# Altium PCB PCB_DO_AN_1_ver2.PcbDoc
Units mm, origin at the board's own origin, x right, y up, seen from the top; angles counter-clockwise.
Board outline 74.17 x 48.77 mm, 2 copper layers (Top Layer, Bottom Layer); 62 components, 44 nets, 228 pads, 44 vias.
Unrouted connection lines stored in the file: 1.
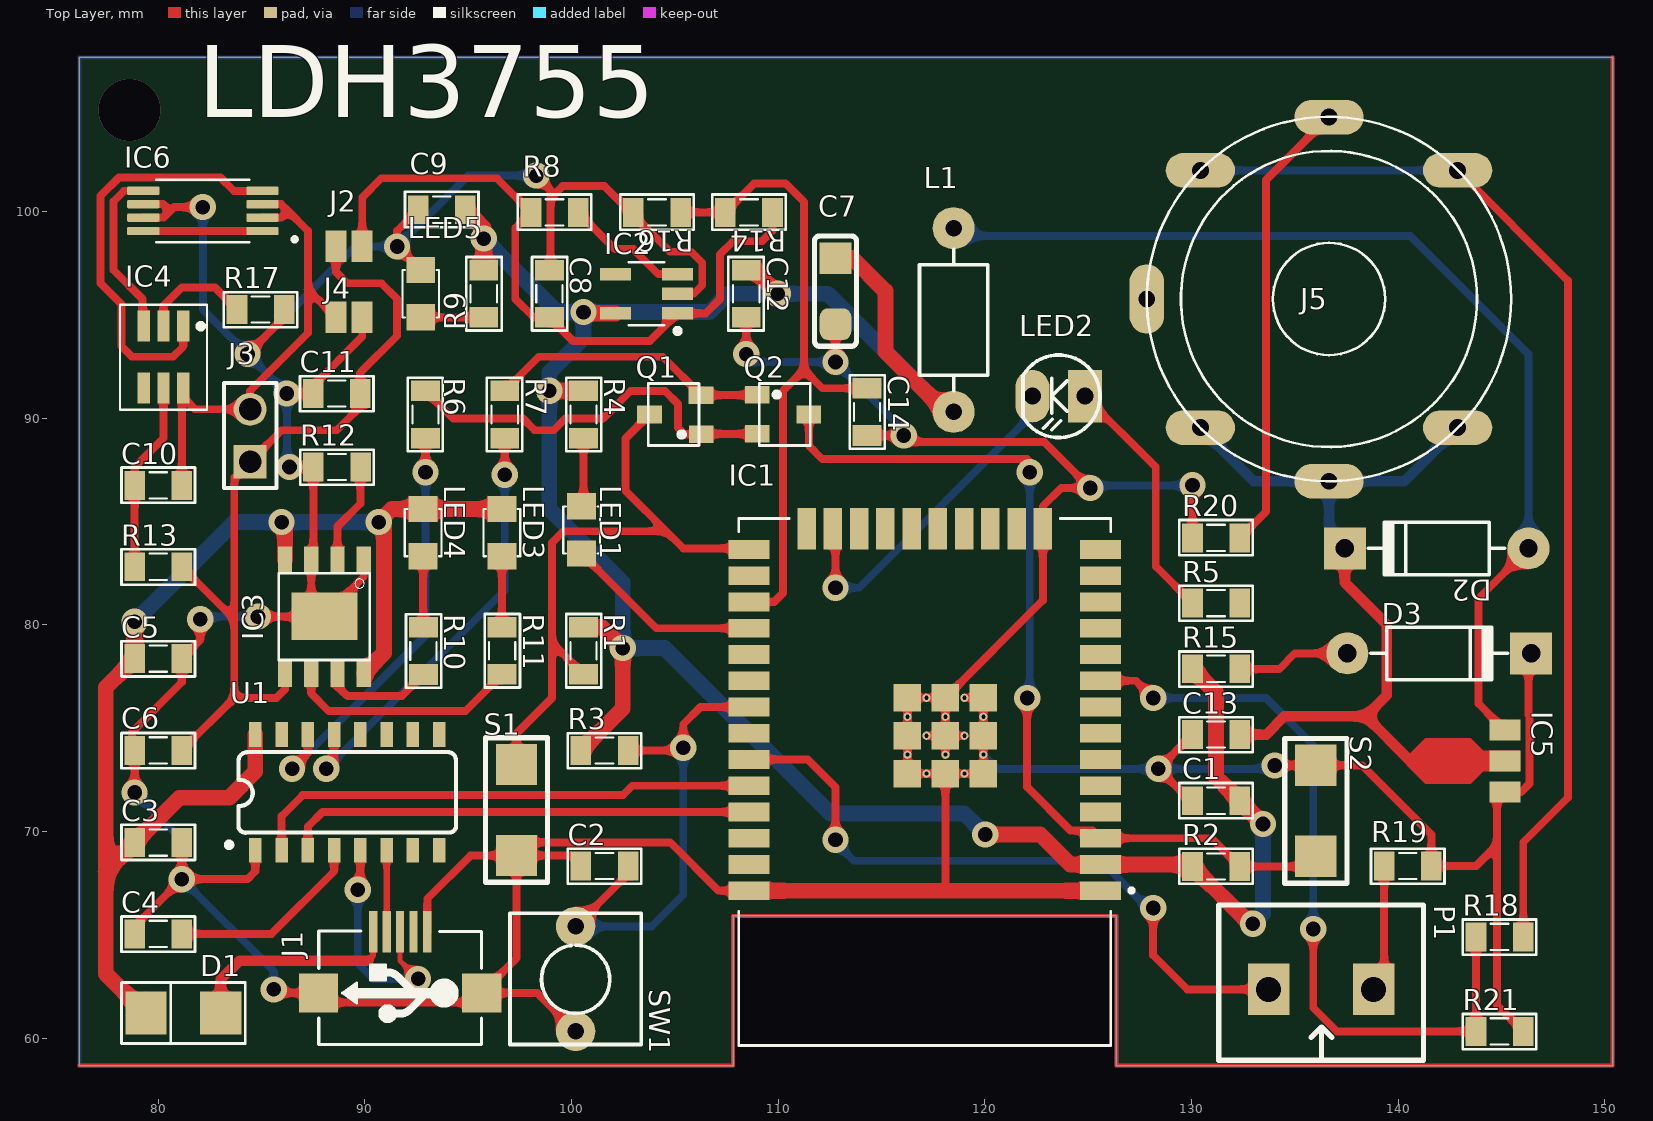
[diagram p0: Top Layer view]
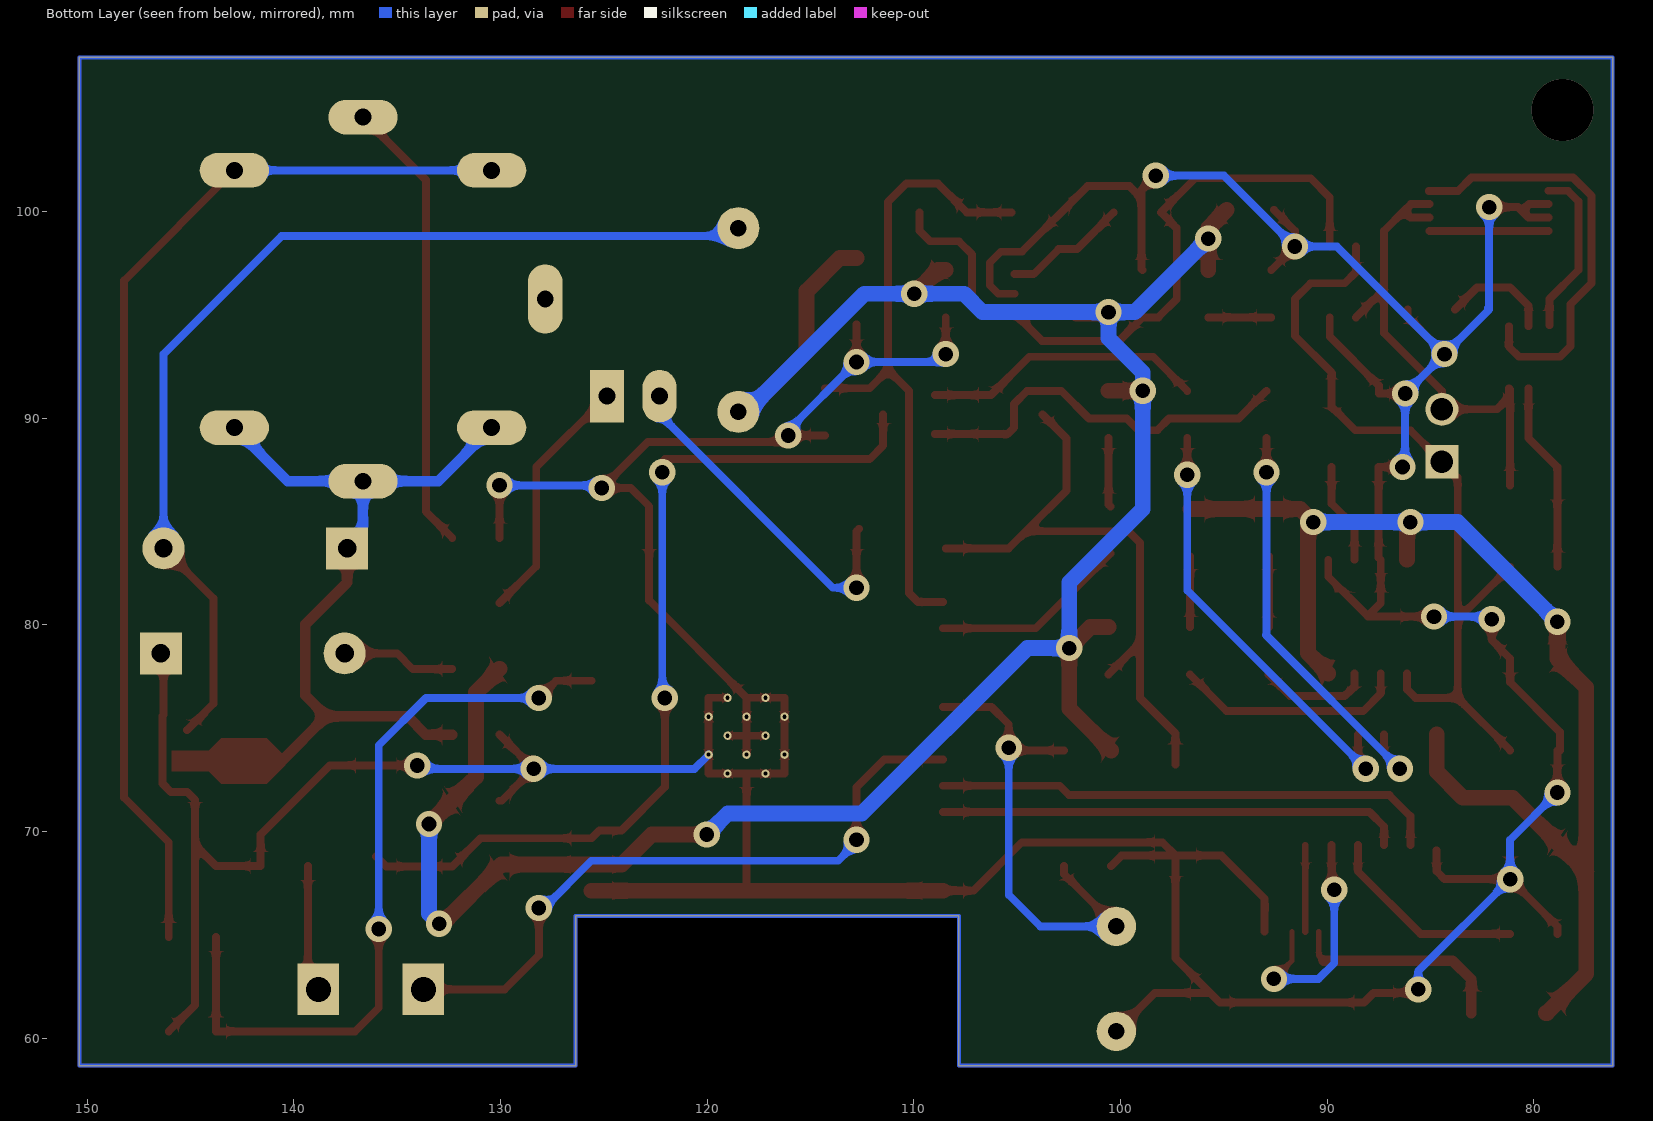
[diagram p1: Bottom Layer view, seen from below]
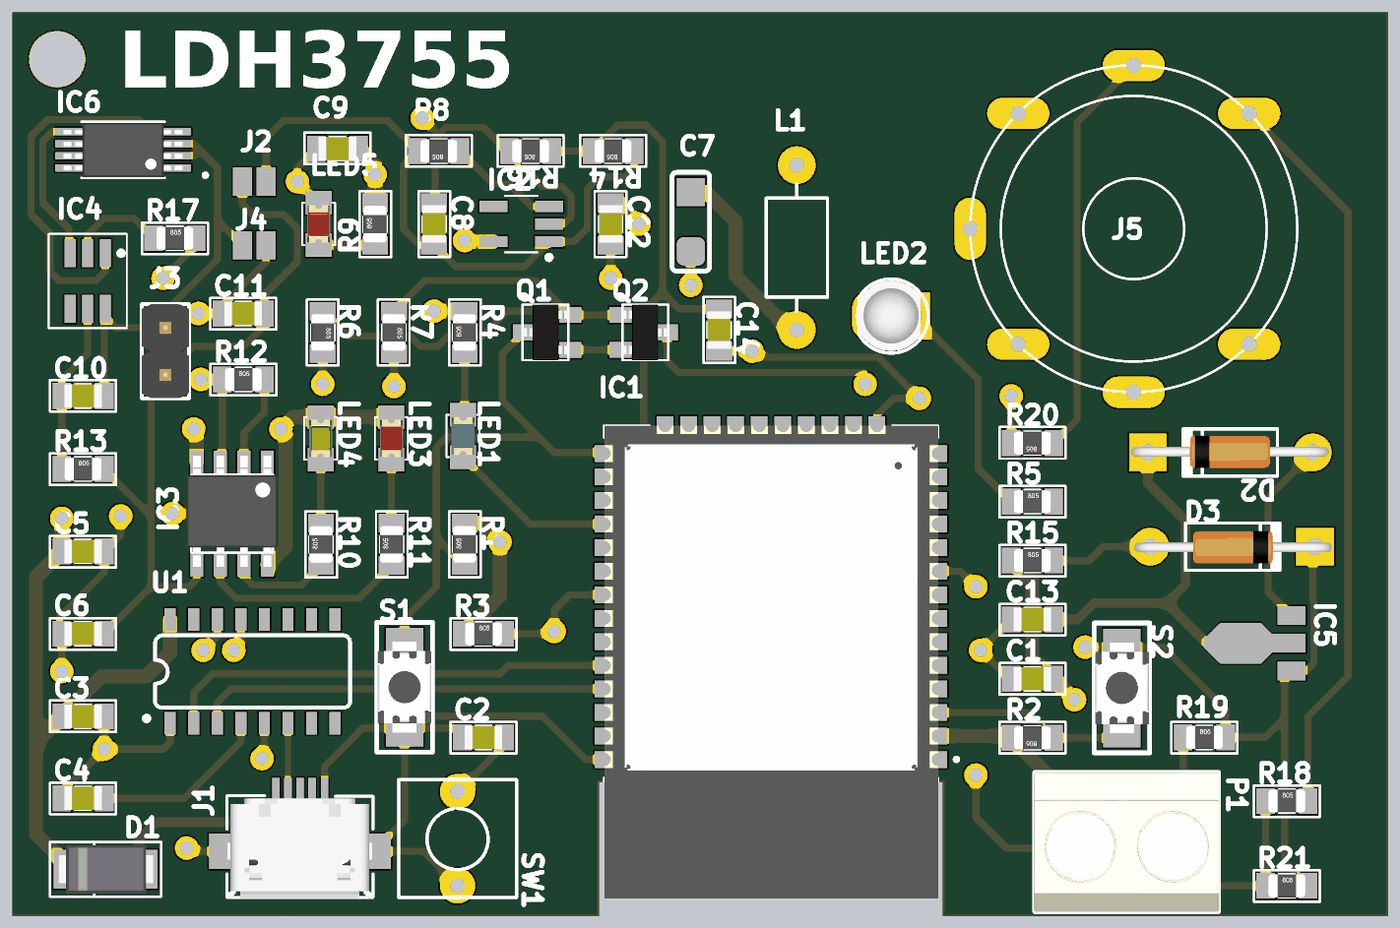
[diagram p2: 3D render of the assembled board from above, using the file's embedded part models]

## Layer stack, top to bottom
Top Solder: solder mask 0.0102, Solder Resist, Dk 3.5
Top Layer: signal copper 0.0356
Dielectric 1: dielectric 0.32, FR-4, Dk 4.8
Bottom Layer: signal copper 0.0356
Bottom Solder: solder mask 0.0102, Solder Resist, Dk 3.5

## Board outline
76.2,58.674 76.2,107.442 150.368,107.442 150.368,58.674 126.365,58.674 126.365,65.913 107.823,65.913 107.823,58.674

## Design rules (kind name [scope] priority, off if disabled: settings)
Clearance [All] p1: gap=0.254 ignorepadtopadclearanceinfootprint=TRUE except(0: Arc-Hole Track-Hole SMDPad-Hole THPad-Hole Via-Hole Fill-Hole Poly-Hole Region-Hole Text-Hole)
PolygonConnect [All] p1: connectstyle=Relief reliefconductorwidth=0.254 reliefentries=4 polygonreliefangle="90 Angle" airgapwidth=0.254
RoutingVias [All] p1: holewidth=0.508 width=0.762 viastyle="Through Hole" minholewidth=0.508 minwidth=0.762 maxholewidth=0.711 maxwidth=1.27
SolderMaskExpansion [All] p1: expansion=0.102
Width [All] p1: maxlimit=0.762 minlimit=0.254 preferedwidth=0.381
30 further rules are at their usual default settings.

## Classes and differential pairs
component class U_Sensor: J5 P1 R18 R19 R20 R21
component class U_POWER: C5 C6 C7 C8 C9 C10 C11 C12 C13 C14 D2 D3 IC2 IC3 IC4 IC5 IC6 J2 J3 J4 L1 LED3 LED4 LED5 R8 R9 R10 R11 R12 R13 R14 R15 R16 R17
component class U_MCU: C1 C2 C3 C4 D1 IC1 J1 LED1 LED2 Q1 Q2 R1 R2 R3 R4 R5 R6 R7 S1 S2 SW1 U1

## Components (designator, comment, footprint, x,y, rotation, side; value= is the part's Value field where it differs from the comment)
C1 "104" CAP_0805 131.191,71.481 r180 top value=33p
C2 "10uF" CAP_0805 101.6,68.326 r0 top value=33p
C3 "10uF" CAP_0805 80.01,69.456 r180 top value=33p
C4 "100nF" CAP_0805 80.01,65.043 r0 top value=33p
C5 "100nF" CAP_0805 80.01,78.359 r0 top value=33p
C6 "100nF" CAP_0805 80.01,73.92 r0 top value=33p
C7 "220uF" CAP_TANTALUM_3216 112.776,96.139 r270 top
C8 "470nF" CAP_0805 98.933,96.012 r90 top value=33p
C9 "100nF" CAP_0805 93.726,100.076 r180 top value=33p
C10 "100nF" CAP_0805 80.01,86.741 r180 top value=33p
C11 "100nF" CAP_0805 88.646,91.186 r0 top value=33p
C12 "104" CAP_0805 108.458,96.012 r270 top value=33p
C13 "104" CAP_0805 131.191,74.686 r0 top value=33p
C14 "100nF" CAP_0805 114.3,90.297 r90 top value=33p
D1 "Diode SMD" DIO-214AC(SMA) 81.153,61.265 r0 top value=1N5007
D2 "1N4007" D1A 146.304,83.693 r0 top
D3 "1N4007" D1A 137.541,78.613 r180 top
IC1 "ESP32-WROOM-32" MODULE_ESP32-WROOM-32 117.094,72.39 r180 top
IC2 "RT9013" SOT23-5 103.632,96.012 r180 top
IC3 "TP4056" TP4056 88.048,80.391 r270 top
IC4 "DW01A" SOT23-6 80.264,92.94 r270 top
IC5 "Power IC" SOT-89-3 143.161,73.406 r90 top
IC6 "FS8205A" FS8205A 82.169,100.076 r180 top
J1 "USB-5" USB-M1 91.709,65.151 r180 top
J2 "Jumper2" JUMPER2 89.878,98.298 r0 top
J3 "VBAT_IN" JP2-D1T 84.455,87.884 r90 top
J4 "Jumper2" JUMPER2 89.878,94.869 r0 top
J5 "Gas Sensor Socket" MQ2 136.652,95.758 r180 top
L1 "150mH" L/0.4 118.491,90.297 r90 top value="150 mH"
LED1 "LED" LED-0805-Blue 100.495,85.725 r270 top value="LED 3 ly Single Colour"
LED2 "LED" LED-3 124.841,91.059 r180 top value="LED 3 ly Single Colour"
LED3 "LED" LED-0805-Red 96.634,85.598 r270 top value="LED 3 ly Single Colour"
LED4 "LED" LED-0805-Green 92.824,85.598 r270 top value="LED 3 ly Single Colour"
LED5 "" LED-0805-Red 92.71,94.869 r90 top value="LED 3 ly Single Colour"
P1 "Header 2 - M" "Medium - Header 2" 136.271,62.357 r180 top
Q1 "2SC1815" SOT23D 105.029,90.17 r90 top value=C1815
Q2 "2SC1815" SOT23D 110.236,90.17 r270 top value=C1815
R1 "10k" RES-SMD-0805 100.584,78.74 r90 top
R2 "10k" RES-SMD-0805 131.191,68.301 r180 top
R3 "10k" RES-SMD-0805 101.6,73.914 r0 top
R4 "Resistor - SMD" RES-SMD-0805 100.584,90.17 r90 top
R5 "Resistor - SMD" RES-SMD-0805 131.191,81.046 r0 top
R6 "10k" RES-SMD-0805 92.939,90.17 r270 top
R7 "10k" RES-SMD-0805 96.774,90.17 r270 top
R8 "10k" RES-SMD-0805 99.187,99.949 r180 top
R9 "1k" RES-SMD-0805 95.758,96.012 r90 top
R10 "1k" RES-SMD-0805 92.837,78.731 r90 top
R11 "1k" RES-SMD-0805 96.647,78.74 r90 top
R12 "1k2" RES-SMD-0805 88.657,87.63 r0 top
R13 "0.1k" RES-SMD-0805 80.01,82.804 r0 top
R14 "30k" RES-SMD-0805 108.585,99.949 r180 top
R15 "Resistor - SMD" RES-SMD-0805 131.191,77.866 r0 top
R16 "100k" RES-SMD-0805 104.14,99.949 r180 top
R17 "1k" RES-SMD-0805 84.963,95.25 r0 top
R18 "Resistor - SMD" RES-SMD-0805 144.907,64.897 r0 top
R19 "Resistor - SMD" RES-SMD-0805 140.462,68.326 r0 top
R20 "Resistor - SMD" RES-SMD-0805 131.191,84.201 r180 top
R21 "Resistor - SMD" RES-SMD-0805 144.907,60.325 r0 top
S1 "SW-SMD" "SW 3x2x4" 97.344,71.034 r270 top
S2 "SW-SMD" "SW 3x2x4" 136.017,70.993 r90 top
SW1 "SW" SW2 100.203,60.325 r90 top value="SW chip 2 pin"
U1 "CH340C" SOP-16 89.154,71.888 r0 top

## Footprints (in the part's own frame and the unit in brackets; to place one, negate y for a bottom-side part, rotate by r counter-clockwise, add the part's x,y. Pads: shape width x height; smd on the part's side, far side on the other; paste and mask are expansions set on the pad)
CAP_0805 [mil]
  rect 39.37x55 smd: 1(-45,0) 2(45,0)
  silkscreen extent -70,-34 70,33, body extent -40,-25 40,25, height 24
CAP_TANTALUM_3216 [mil]
  rect 60x60 smd: 1(-62.99,0)
  rrect50% 60x60 smd: 2(62.99,0)
  silkscreen extent -105,-40 105,40, body extent -67,-35 67,35, height 67
D1A [mil] "Diode 1A, W 100mil, L 350mil"
  round 80 hole 35: 1(0,0)
  rect 80x80 hole 35: 2(-350,0)
  silkscreen extent -305,-50 -45,50, body extent -386,-33 34,36, height 84
DIO-214AC(SMA) [mm] "DO-214AC Diode Smallest Size"
  rect 2x2.1 smd: 1(1.88,-0.051) 2(-1.732,-0.051)
  silkscreen extent -2.92,-1.52 3.07,1.42, body extent -2.5,-1.35 2.7,1.25, height 2.4
FS8205A [mm]
  rrect25% 1.56x0.4 smd: 1(-2.88,1.031) 2(-2.88,0.381) 3(-2.88,-0.269) 4(-2.88,-0.919) 5(2.88,-0.919) 6(2.88,-0.269) 7(2.88,0.381) 8(2.88,1.031)
  silkscreen extent -4.54,-1.46 2.25,1.57, body extent -3.2,-1.4 3.2,1.53, height 1.2
JP2-D1T [mm] "2 pins, 1 row, straight, gold plating"
  rect 1.6x1.6 hole 1.1: 1(0,0)
  round 1.6 hole 1.1: 2(2.54,0)
  silkscreen extent -1.27,-1.27 3.81,1.27, body extent -1.27,-1.27 3.81,1.27, height 8.54
JUMPER2 [mil]
  rect 40x60 smd: 1(-50,0) 2(0,0)
L/0.4 [mil] "Inductor , 2 Pin, L 350mil, W 150 mil"
  round 80 hole 31: 1(0,0) 2(350,0)
  silkscreen extent 40,-65 310,65
LED-3 [mil] "LED 2 PIN, 3ly Only colour"
  rect 65x100 hole 32: 1(0,0)
  oval 65x100 hole 32: 2(100,0)
  silkscreen extent -29,-78 118,79, body extent -13,-75 125,75, height 217
LED-0805-Blue [mil]
  rect 50x55 smd: 1(0,0) 2(90,0)
  silkscreen extent 0,-35 90,35, body extent 5,-25 85,25, height 43
LED-0805-Green [mil]
  rect 50x55 smd: 1(0,0) 2(90,0)
  silkscreen extent 0,-35 90,35, body extent 5,-25 85,25, height 43
LED-0805-Red [mil]
  rect 50x55 smd: 1(0,0) 2(90,0)
  silkscreen extent 0,-35 90,35, body extent 5,-25 85,25, height 43
"Medium - Header 2" [mm]
  rect 2x2.5 hole 1.2: 1(-2.54,0) 2(2.54,0)
  silkscreen extent -4.95,-4.08 4.95,3.43, body extent -5,-4.07 5,3.43, height 10
MODULE_ESP32-WROOM-32 [mm]
  rect 2x0.9 smd: 1(-8.5,5.26) 2(-8.5,3.99) 3(-8.5,2.72) 4(-8.5,1.45) 5(-8.5,0.18) 6(-8.5,-1.09) 7(-8.5,-2.36) 8(-8.5,-3.63) 9(-8.5,-4.9) 10(-8.5,-6.17) 11(-8.5,-7.44) 12(-8.5,-8.71) 13(-8.5,-9.98) 14(-8.5,-11.25) 25(8.5,-11.25) 26(8.5,-9.98) 27(8.5,-8.71) 28(8.5,-7.44) 29(8.5,-6.17) 30(8.5,-4.9) 31(8.5,-3.63) 32(8.5,-2.36) 33(8.5,-1.09) 34(8.5,0.18) 35(8.5,1.45) 36(8.5,2.72) 37(8.5,3.99) 38(8.5,5.26)
  rect 0.9x2 smd: 15(-5.715,-12.25) 16(-4.445,-12.25) 17(-3.175,-12.25) 18(-1.905,-12.25) 19(-0.635,-12.25) 20(0.635,-12.25) 21(1.905,-12.25) 22(3.175,-12.25) 23(4.445,-12.25) 24(5.715,-12.25)
  rect 1.33x1.33 smd: 39_1(-2.835,-0.405) 39_2(-1,-0.405) 39_3(0.835,-0.405) 39_4(-2.835,-2.24) 39_5(-1,-2.24) 39_6(0.835,-2.24) 39_7(-2.835,-4.075) 39_8(-1,-4.075) 39_9(0.835,-4.075)
  round 0.4 hole 0.2: 39_10(-1.917,-0.405) 39_11(-0.082,-0.405) 39_12(-2.835,-1.322) 39_13(-1,-1.322) 39_14(0.835,-1.322) 39_15(-1.917,-2.24) 39_16(-0.082,-2.24) 39_17(-2.835,-3.157) 39_18(-1,-3.157) 39_19(0.835,-3.157) 39_20(-1.917,-4.075) 39_21(-0.082,-4.075)
  silkscreen extent -10.1,-12.75 9,12.75, body extent -9.02,-12.75 8.98,12.75, height 3.2
MQ2 [mil] "6P-D17.6X9.8H"
  oval 132x66 hole 32: 1(-244.98,245) 2(0,347) 3(245,245) 4(245,-244.98) 5(0,-346.46) 6(-244.98,-244.98)
  oval 66x132 hole 32: 7(347,0)
  silkscreen extent -347,-347 347,347
RES-SMD-0805 [mil]
  rect 39.37x55 smd: 1(-45,0) 2(45,0)
  silkscreen extent -70,-34 70,33, body extent -39,-25 39,25, height 31
SOP-16 [mm]
  rect 0.6x1.2 smd: 1(-4.445,-2.8) 2(-3.175,-2.8) 3(-1.905,-2.8) 4(-0.635,-2.8) 5(0.635,-2.8) 6(1.905,-2.8) 7(3.175,-2.8) 8(4.445,-2.8) 9(4.445,2.8) 10(3.175,2.8) 11(1.905,2.8) 12(0.635,2.8) 13(-0.635,2.8) 14(-1.905,2.8) 15(-3.175,2.8) 16(-4.445,2.8)
  silkscreen extent -5.84,-2.67 5.26,1.95, body extent -4.95,-3.47 4.95,3.47, height 1.75
SOT23-5 [mm] "SOT23, 5-Leads, Body 3.0x3.0mm (max), Pitch 0.95mm, IPC Medium Density"
  rect 1.5x0.6 smd: 1(-1.5,0.95) 2(-1.5,0) 3(-1.5,-0.95) 4(1.5,-0.95) 5(1.5,0.95)
  silkscreen extent -1.63,-1.52 0.87,1.92, body extent -1.75,-1.52 1.75,1.53, height 1.45
SOT23-6 [mm] "SOT23, 5-Leads, Body 3.0x3.0mm (max), Pitch 0.95mm, IPC Medium Density"
  rect 1.5x0.6 smd: 1(-1.5,0.95) 2(-1.5,0) 3(-1.5,-0.95) 4(1.5,-0.95) 5(1.5,0) 6(1.5,0.95)
  silkscreen extent -2.54,-2.11 2.54,2.11, body extent -1.75,-1.52 1.75,1.53, height 1.45
SOT23D [mm] "SOT 23C - 1-3-2 - BCE"
  rect 0.85x1.2 smd: 1(-0.95,-1.25) 2(0.94,-1.245) 3(0,1.25)
  silkscreen extent -1.5,-1.14 1.5,1.32, body extent -1.5,-1.17 1.5,1.33, height 1.06
SOT-89-3 [mm]
  rect 1x1.5 smd: 1(-1.5,-2) 3(1.5,-2)
  rect 1x1.5 smd paste-2 mask+0: 2(0,-2)
  Top Layer region: 1.1,1.85 1.1,-0.35 0.5,-0.95 0.5,-2.75 -0.5,-2.75 -0.5,-0.95 -1.1,-0.35 -1.1,1.85 -0.2,2.75 0.2,2.75
SW2 [mil] "SW button 2pin, 250x 250 mil"
  round 75 hole 31: 1(0,0) 2(200,0)
  silkscreen extent -25,-125 225,125
"SW 3x2x4" [mm]
  rect 2x2 smd: 1(-2.2,0) 2(2.2,0)
  silkscreen extent -3.5,-1.5 3.5,1.5, body extent -2.45,-1.45 2.45,1.45, height 2
TP4056 [mm]
  rect 1.3x0.7 smd: 1(-2.75,1.905) 2(-2.75,0.635) 3(-2.75,-0.635) 4(-2.75,-1.905) 5(2.75,-1.905) 6(2.75,-0.635) 7(2.75,0.635) 8(2.75,1.905)
  rect 2.3x3.2 smd: 3(-0.025,0)
  silkscreen extent -2.1,-2.2 2.1,2.2, body extent -3.13,-2.45 2.87,2.45, height 1.75
USB-M1 [mm]
  rect 0.4x2 smd: 1(1.3,0) 2(0.65,0) 3(0,0) 4(-0.65,0) 5(-1.321,0)
  rect 1.9x1.9 smd: 5(-3.95,2.968) 5(3.95,2.968)
  silkscreen extent -3.94,-0.03 3.94,5.46, body extent -3.98,0.11 4,5.54, height 2.71

## Part data
C1 C2 C3 C4 C5 C6 C8 C9 C10 C11 C12 C13 C14: library part CapSMD, "Capacitor", LatestRevisionDate=17-Jul-2002, LatestRevisionNote="Re-released for DXP Platform.", PackageReference=RAD-0.3, Published=8-Jun-2000, Publisher="Altium Limited"
C7: library part "Cap Pol", "Polarized Capacitor (Axial)", LatestRevisionDate=17-Jul-2002, LatestRevisionNote="Re-released for DXP Platform.", PackageReference=POLAR0.8, Published=8-Jun-2000, Publisher="Altium Limited"
D1: "Default Diode", Code - JEDEC=DO-214-AB, Published=8-Jun-2000, Publisher="Altium Limited", Revision="July-2002: Re-released for DXP Platform."
D2 D3: library part D1A, "Diode 1A"
IC1: "Bluetooth, WiFi Transceiver Module 2.4GHz ~ 2.5GHz Surface Mount", Package="Module Espressif Systems", Digi-Key_Part_Number=1904-1010-1-ND, Digi-Key_Purchase_URL=https://www.digikey.com/product-detail/en/espressif-systems/ESP32-WROOM-32/1904-1010-1-ND/8544305?utm_source=snapeda&utm_medium=aggregator&utm_campaign=symbol, MF="Espressif Systems", MP=ESP32-WROOM-32, SnapEDA_Link=https://www.snapeda.com/parts/ESP32-WROOM-32/Espressif%20Systems/view-part/2753322/?ref=snap
IC2: "https://linhkien.cxt.vn/5435-rt9013-33gb-ic-reg-linear-33v-500ma-sot23-5.html"
IC3: "Complete single cell Li-Ion battery with a constant current / constant voltage linear charger"
IC4: "One Cell Lithium-ion/Polymer Battery Protection IC"
IC5: library part CE8301A/BL8530, "Boost 5V IC 500mA"
J1: Manufacturer=FCI, Manufacturer Part Number=10118193-0001LF, Supplier Part Number 1=609-4616-1-ND, .Checked PCB=RF, .Checked SCH=MM, .Creator=MM, Category="Connectors, Interconnects", ComponentLink1Description=http://portal.fciconnect.com/Comergent//fci/drawing/10118193.pdf, ComponentLink1URL=http://portal.fciconnect.com/Comergent//fci/drawing/10118193.pdf, Connector Type="USB - micro B", Features="Shielded, Solder Retention", Gender=Receptacle, Ingress Protection=-, Mounting Type="Surface Mount, Right Angle, Horizontal", Number of Contacts=5, Packaging="Cut Tape (CT)", Pricing 1="1=0.46, 10=0.433, 25=0.3712, 50=0.3156, 100=0.3032, 250=0.27224, 500=0.25988 (USD)", RoHS="RoHS Compliant", Specifications="USB 2.0", Stock 1=28642, Supplier 1=Digi-Key
J2 J4: "Jumper, 2-Pin"
J3: library part JP2, "WR-PHD 2.54 mm Angled Socket Header", Manufacturer="Würth Elektronik eiSos GmbH", partNo=613002143121, ComponentLink1 Description=Manufacturer, ComponentLink1URL=http://www.we-online.com, ComponentLink2 Description=Datasheet, ComponentLink2URL=http://katalog.we-online.de/em/datasheet/6130xx143121.pdf, Created by="Karrer Zheng", Created Date="29 March 2013", NoPins=02
J5: library part MQ2
L1: library part L1, "Inductor"
LED1 LED2 LED3 LED4: "LED Single colour Green and Red"
LED5: library part LED, "LED Single colour Green and Red"
P1: "Header, 2-Pin, Medium", LatestRevisionDate=17-Jul-2002, LatestRevisionNote="Re-released for DXP Platform.", Publisher="Altium Limited"
Q1 Q2: library part C1815, "NPN 600mW, ECB", =C2383
R1 R2 R3 R6 R7 R9 R13 R17: library part "Resistor - SMD", "Resistor SMD", Manufacturer="Generic Components", Class=Passive, Published=08/06/2000, Publisher="Altium Hobart Technology Centre"
R4 R5 R15 R18 R19 R20 R21: "Resistor SMD", Manufacturer="Generic Components", Class=Passive, Published=08/06/2000, Publisher="Altium Hobart Technology Centre"
R8 R10 R11 R12 R14 R16: library part "Resistor - SMD", "Resistor", Manufacturer="Generic Components", Class=Passive, Published=08/06/2000, Publisher="Altium Hobart Technology Centre"
S1 S2: "Switch", LatestRevisionDate=17-Jul-2002, LatestRevisionNote="Re-released for DXP Platform.", PackageReference=SPST-2, Published=24-Mar-1999, Publisher="Altium Limited"
SW1: library part SW2, "Switch button 2 pin"
U1: "USB to serial chip CH340", Package=Package, Availability=Unavailable, Check_prices=https://www.snapeda.com/parts/CH340C/WCH/view-part/5428851/?ref=eda, MF=WCH, MP=CH340C, Price=None, SnapEDA_Link=https://www.snapeda.com/parts/CH340C/WCH/view-part/5428851/?ref=snap

## Via types
v1: diameter 1.27, hole 0.711, Top Layer to Bottom Layer, 43 vias
v2: diameter 3, hole 3, Top Layer to Bottom Layer, 1 vias

## Nets (pads, with @x,y where several pads share a name; then routed paths per layer and width w, separated by ;. In a path a pad name is that pad's centre, name@x,y a point inside that pad or via, vN(x,y) a via of type N, cw(c..) or ccw(c..) an arc to the next point about the centre after c; other vN are vias at no path point)
3V3: C1.1 C7.1 C9.1 C12.1 IC1.2 IC2.5 L1.1 R1.2 R2.2 R3.1 R4.2 R5.2 R9.2 R15.1 | length 122.9
  Top Layer w0.762: C9.1 95.758,99.187 v1(95.758,98.679) R9.2 ; v1(98.933,91.313) R4.2 ; R3.1 102.489,75.946 v1(102.489,78.867) 101.473,79.883 R1.2 ; v1(100.584,95.123) 100.645,95.062 IC2.5 ; C12.1 108.839,97.155 v1(109.982,96.012) ; C7.1 113.589,97.739 115.189,96.139 115.189,93.218 L1.1@118.491,89.916 ; v1(120.015,69.85) 122.682,69.85 124.132,68.4 IC1.2 129.949,68.4 R2.2 132.817,65.532 v1(132.969,65.532) ; R15.1 131.183,76.731 131.183,72.632 C1.1 v1(133.457,70.358)
  Bottom Layer w0.762: v1(95.758,98.679) 99.314,95.123 v1(100.584,95.123) ; v1(98.933,91.313) 98.933,92.202 100.584,93.853 v1(100.584,95.123) ; v1@98.933,91.44 98.933,85.598 102.489,82.042 v1(102.489,78.867) 104.521,78.867 112.522,70.866 118.999,70.866 v1(120.015,69.85) ; L1.1@118.491,89.916 112.395,96.012 v1(109.982,96.012) 107.569,96.012 106.68,95.123 v1(100.584,95.123) ; v1(132.969,65.532) 133.457,66.02 v1(133.457,70.358)
5V: C3.2 C5.1 D1.2 IC3.4 IC3.8 LED3.1 LED4.1 U1.16 | length 61.1
  Top Layer w0.762: v1(78.867,80.137) C5.1 77.47,76.962 77.47,68.059 ; D1.2 79.375,61.214 77.47,63.119 77.47,68.059 ; U1.16 84.709,72.898 83.439,71.628 81.039,71.628 C3.2 77.47,68.059 ; v1(85.979,84.963) 86.143,84.799 IC3.4 ; IC3.8 90.938,78.626 90.938,84.703 v1(90.678,84.963) 91.313,85.598 LED4.1 LED3.1
  Bottom Layer w0.762: v1(78.867,80.137) 83.693,84.963 v1(85.979,84.963) v1(90.678,84.963)
GND: C1.2 C2.1 C3.1 C4.1 C5.2 C6.1 C7.2 C8.2 C9.2 C11.1 C12.2 C13.1 C14.1 D3.2 IC1.1 IC1.15 IC1.38 IC1.39_1 IC1.39_2 IC1.39_3 IC1.39_4 IC1.39_5 IC1.39_6 IC1.39_7 IC1.39_8 IC1.39_9 IC1.39_10 IC1.39_11 IC1.39_12 IC1.39_13 IC1.39_14 IC1.39_15 IC1.39_16 IC1.39_17 IC1.39_18 IC1.39_19 IC1.39_20 IC1.39_21 IC2.2 IC3.1 IC3.3 IC5.1 IC6.6 IC6.7 J1.5 J4.2 LED5.2 R12.1 R16.2 R17.2 R19.2 R20.2 R21.2 S1.2 S2.2 SW1.1 U1.1 | length 302.2
  Top Layer w0.381: C6.1@78.74,73.914 78.74,74.803 81.153,77.216 C5.2 82.042,79.248 v1(82.042,80.264) ; C4.1 78.867,65.405 v1(81.153,67.691) ; v1(78.867,71.882) C6.1 ; IC6.7 80.264,99.695 80.581,100.013 ; IC6.6 80.249,100.345 80.581,100.013 ; C3.1 v1(81.153,67.691) ; v1(82.169,100.203) 80.772,100.203 80.581,100.013 ; v1(84.328,93.091) 86.106,94.869 R17.2 ; U1.1 84.709,68.072 84.328,67.691 v1(81.153,67.691) ; v1(84.836,80.391) 88.023,80.391 IC3.3@88.048,80.416 ; v1(85.598,62.357) 85.772,62.183 87.759,62.183 88.22,61.722 95.198,61.722 J1.5@95.659,62.183 ; v1(86.233,91.186) C11.1 87.503,91.567 89.878,93.942 J4.2 ; v1(86.36,87.63) R12.1 87.514,83.241 87.413,83.141 87.413,81.051 IC3.3@88.048,80.416 ; IC3.1 89.953,82.321 IC3.3@88.048,80.416 ; C9.2 91.567,99.06 v1(91.567,98.298) LED5.2 ; J1.5@93.03,65.151 93.03,66.741 95.123,68.834 S1.2 ; v1(98.298,101.727) 98.989,101.036 98.989,100.64 ; C8.2 98.989,97.211 98.989,100.64 ; SW1.1 98.345,62.183 J1.5@95.659,62.183 ; C2.1 99.949,68.834 S1.2 ; IC2.2 105.918,96.012 106.327,96.421 106.327,97.508 105.791,98.044 104.775,98.044 101.6,101.219 99.568,101.219 98.989,100.64 ; v1(108.458,93.091) C12.2 ; IC1.38 107.114,67.13 104.775,69.469 97.979,69.469 S1.2 ; v1(112.776,92.71) C7.2 ; C14.1 v1(116.078,89.154) 116.395,88.837 122.872,88.837 v1(125.095,86.614) 123.698,86.614 122.809,85.725 IC1.15 122.809,81.18 IC1.39_8 ; IC1.39_16 IC1.39_5 ; IC1.39_13 IC1.39_5 ; 118.11,67.13 118.094,67.146 IC1.39_2 ; IC1.39_15 IC1.39_5 ; IC1.39_20 IC1.39_7 IC1.39_17 IC1.39_4 IC1.39_12 IC1.39_1 IC1.39_10 IC1.39_2 ; C1.2 129.941,71.481 v1(128.397,73.025) 128.397,73.035 C13.1 ; R20.2 v1(130.048,86.741) ; v1(134.026,73.193) S2.2 138.262,73.193 141.605,69.85 R19.2 143.764,68.326 144.78,69.342 ; R21.2 144.78,61.595 144.78,69.342 ; D3.2 146.304,78.486 146.304,75.642 146.356,75.59 146.356,72.315 145.947,71.906 IC5.1 144.78,71.525 144.78,69.342 ; J1.5@95.659,62.183 97.344,63.868 S1.2 ; IC1.39_2 IC1.39_11 IC1.39_3 IC1.39_14 IC1.39_6 IC1.39_19 IC1.39_9 IC1.39_21 IC1.39_8 ; IC1.39_5 IC1.39_18 IC1.39_8
  Top Layer w0.762: IC1.38 118.11,67.13 IC1.1
  Bottom Layer w0.381: v1(78.867,71.882) 81.153,69.596 v1(81.153,67.691) 85.598,63.246 v1(85.598,62.357) ; v1(82.042,80.264) 82.169,80.391 v1(84.836,80.391) ; v1(82.169,100.203) 82.169,95.377 82.233,95.313 82.169,95.25 v1(84.328,93.091) ; v1(86.36,87.63) 86.233,87.757 v1(86.233,91.186) v1(84.328,93.091) ; v1(98.298,101.727) 94.996,101.727 v1(91.567,98.298) 89.535,98.298 v1(84.328,93.091) ; v1(108.458,93.091) 108.839,92.71 v1(112.776,92.71) 116.078,89.408 v1(116.078,89.154) ; IC1.39_12 120.616,73.025 v1(128.397,73.025) 133.858,73.025 v1(134.026,73.193) ; v1(125.095,86.614) 125.222,86.741 v1(130.048,86.741)
GPIO0: IC1.25 Q1.3 R1.1 S1.1 | length 30.5
  Top Layer w0.381: S1.1 97.344,74.738 99.06,76.454 99.06,79.121 ; R1.1 99.06,79.121 ; Q1.3 102.616,89.007 102.616,86.487 104.584,84.519 ; IC1.25@108.458,83.693 105.41,83.693 104.584,84.519 ; 99.06,79.121 99.06,83.966 99.612,84.519 104.584,84.519
GPIO14: IC1.23 LED2.2 | length 16.8
  Top Layer w0.381: IC1.23 112.776,84.513 v1(112.776,81.788)
  Bottom Layer w0.381: v1(112.776,81.788) 113.919,81.788 122.301,90.17 LED2.2
GPIO17: IC1.28 LED1.2 | length 9.6
  Top Layer w0.381: LED1.2 104.104,79.83 IC1.28
GPIO19: C2.2 IC1.31 R3.2 SW1.2 | length 24.3
  Top Layer w0.381: SW1.2 102.743,67.945 C2.2 ; R3.2 105.283,73.914 v1(105.41,74.041) 105.41,75.184 106.246,76.02 IC1.31
  Bottom Layer w0.381: SW1.2 103.886,65.405 105.41,66.929 v1(105.41,74.041)
NetC4_2: C4.2 U1.4 | length 9.9
  Top Layer w0.381: C4.2 85.49,65.043 88.519,68.072 U1.4@88.519,69.342
NetC10_1: C10.1 IC4.6 IC6.2 IC6.3 J3.2 J4.1 | length 24.5
  Top Layer w0.381: C10.1 81.153,91.379 IC4.6 81.214,90.998 81.788,90.424 J3.2 84.455,91.313 87.249,94.107 87.249,96.228 ; IC6.2 85.979,99.695 86.296,100.013 ; IC6.3 85.964,100.345 86.296,100.013 ; J4.1 87.249,96.228 ; 86.296,100.013 87.249,99.06 87.249,96.228
NetC10_2: C10.2 IC4.5 R13.1 | length 9.2
  Top Layer w0.381: R13.1 C10.2 78.867,87.63 80.264,89.027 IC4.5
NetC13_2: C13.2 D2.2 IC5.2 J5.1 J5.2 J5.3 | length 41.6
  Top Layer w0.508: C13.2 133.614,74.686 134.493,75.565 138.43,75.565 ; D2.2 137.414,82.042 139.446,80.01 139.446,76.581 138.43,75.565 ; IC5.2 140.589,73.406 138.43,75.565
  Bottom Layer w0.508: J5.3 133.02,86.944 J5.2 ; D2.2 136.652,84.455 J5.2 ; J5.1 140.284,86.944 J5.2
NetC14_2: C14.2 IC1.27 R14.2 R16.1 | length 31.5
  Top Layer w0.381: R16.1 R14.2 108.839,101.346 110.363,101.346 111.252,100.457 111.252,92.329 ; IC1.27 109.802,81.1 110.236,81.534 110.236,91.313 111.252,92.329 ; C14.2 112.141,91.44 111.252,92.329
NetD1_1: D1.1 J1.1 | length 10.6
  Top Layer w0.254: 90.17,63.754 90.409,63.993 J1.1
  Top Layer w0.508: D1.1 83.033,62.84 83.947,63.754 90.17,63.754
NetD2_1: D2.1 IC5.3 L1.2 | length 49.9
  Top Layer w0.381: IC5.3 143.891,76.176 143.891,81.28 D2.1
  Bottom Layer w0.381: L1.2@118.491,98.806 140.589,98.806 146.304,93.091 D2.1
NetD3_1: D3.1 R15.2 | length 5.5
  Top Layer w0.381: R15.2 132.349,77.851 134.239,77.851 135.001,78.613 D3.1
NetIC1_9: IC1.9 R18.1 R21.1 | length 37.2
  Top Layer w0.381: IC1.9 127.307,77.29 v1(128.143,76.454) ; v1(135.89,65.278) 135.89,61.468 137.033,60.325 R21.1 R18.1
  Bottom Layer w0.381: v1(128.143,76.454) 133.604,76.454 135.89,74.168 v1(135.89,65.278)
NetIC1_33: IC1.33 P1.2 | length 32.6
  Top Layer w0.381: IC1.33 111.432,73.48 112.776,72.136 v1(112.776,69.596) ; v1(128.143,66.294) 128.143,64.008 129.794,62.357 P1.2
  Bottom Layer w0.381: v1(112.776,69.596) 112.776,69.469 113.665,68.58 125.603,68.58 127.889,66.294 v1(128.143,66.294)
NetIC2_3: IC2.3 R8.1 | length 6
  Top Layer w0.381: R8.1 102.108,98.171 102.997,98.171 104.206,96.962 IC2.3
NetIC3_2: IC3.2 R12.2 | length 4.9
  Top Layer w0.381: IC3.2 88.683,84.746 89.789,85.852 R12.2@89.789,87.63
NetIC3_6: IC3.6 R11.1 | length 11.3
  Top Layer w0.381: IC3.6 87.413,76.671 88.265,75.819 94.869,75.819 R11.1
NetIC3_7: IC3.7 R10.1 | length 5.4
  Top Layer w0.381: IC3.7 88.683,77.022 89.159,76.546 91.796,76.546 R10.1
NetIC4_1: IC4.1 IC6.4 | length 20.6
  Top Layer w0.381: IC4.1 81.214,93.451 80.727,92.964 78.74,92.964 78.232,93.472 78.232,95.504 77.216,96.52 77.216,100.749 78.106,101.639 83.019,101.639 83.668,100.99 IC6.4@85.09,100.99
NetIC4_2: IC4.2 R17.1 | length 5.4
  Top Layer w0.381: IC4.2 80.264,95.429 81.153,96.318 82.752,96.318 R17.1
NetIC4_3: IC4.3 IC6.5 | length 8.2
  Top Layer w0.381: IC4.3@79.248,94.488 79.248,95.758 77.851,97.155 77.851,100.486 78.36,100.995 IC6.5
NetIC6_1: IC6.1 IC6.8 | length 5.8
  Top Layer w0.381: IC6.8 IC6.1
NetJ1_2: J1.2 U1.6 | length 4.2
  Top Layer w0.305: J1.2 U1.6@91.059,69.342
NetJ1_3: J1.3 U1.5 | length 11.7
  Top Layer w0.254: J1.3 91.709,63.739 v1(92.583,62.865)
  Top Layer w0.381: v1(89.662,67.183) 89.789,67.31 U1.5@89.789,69.342
  Bottom Layer w0.381: v1(89.662,67.183) 89.662,63.627 90.424,62.865 v1(92.583,62.865)
NetJ5_4: J5.4 J5.6 R18.2 | length 52.6
  Top Layer w0.381: J5.6 148.209,96.646 148.209,71.628 146.05,69.469 R18.2
  Bottom Layer w0.381: J5.4 J5.6
NetJ5_5: J5.5 R20.1 | length 22.1
  Top Layer w0.381: R20.1 133.604,85.471 133.604,101.51 J5.5
NetLED1_1: LED1.1 R4.1 | length 3.3
  Top Layer w0.381: LED1.1 100.584,85.814 R4.1
NetLED2_1: LED2.1 R5.1 | length 12.2
  Top Layer w0.381: LED2.1 128.27,87.63 128.27,82.824 R5.1
NetLED3_2: LED3.2 R11.2 | length 3.4
  Top Layer w0.381: LED3.2 96.634,79.896 R11.2
NetLED4_2: LED4.2 R10.2 | length 3.4
  Top Layer w0.381: LED4.2 92.824,79.887 R10.2
NetLED5_1: LED5.1 R9.1 | length 3
  Top Layer w0.381: LED5.1 R9.1
NetP1_1: P1.1 R19.1 | length 6.2
  Top Layer w0.381: P1.1 139.319,62.865 R19.1
NetQ1_1: Q1.1 Q2.2 R6.1 | length 19.2
  Top Layer w0.381: R6.1 94.28,89.972 97.657,89.972 98.22,89.408 99.138,89.408 99.701,89.971 101.528,89.971 102.87,91.313 104.521,91.313 105.156,90.678 105.156,89.535 105.471,89.22 Q1.1 106.289,89.23 Q2.2
NetQ1_2: Q1.2 Q2.1 R7.1 | length 13.7
  Top Layer w0.381: R7.1 98.425,92.964 104.419,92.964 Q1.2 108.976,91.11 Q2.1
NetR6_2: R6.2 U1.14 | length 21.1
  Top Layer w0.381: v1(86.487,73.025) 87.249,73.787 U1.14 ; v1(92.939,87.376) 92.939,87.147 R6.2
  Bottom Layer w0.381: v1(86.487,73.025) 92.964,79.502 92.939,79.527 v1(92.939,87.376)
NetR7_2: R7.2 U1.13 | length 21.4
  Top Layer w0.381: v1(88.138,73.025) 88.519,73.406 U1.13 ; v1(96.774,87.249) R7.2
  Bottom Layer w0.381: v1(88.138,73.025) 96.774,81.661 v1(96.774,87.249)
RST: IC1.3 Q2.3 R2.1 S2.1 | length 44.1
  Top Layer w0.381: Q2.3 111.486,88.666 112.141,88.011 122.047,88.011 122.174,87.884 v1(122.174,87.376) ; v1(122.047,76.454) 122.047,72.148 124.15,70.045 125.219,70.045 IC1.3 130.965,69.67 R2.1 135.525,68.301 S2.1
  Bottom Layer w0.381: v1(122.047,76.454) 122.174,76.581 v1(122.174,87.376)
RX0: IC1.34 U1.2 | length 24.6
  Top Layer w0.381: U1.2@85.979,69.342 85.979,70.739 86.995,71.755 102.489,71.755 102.944,72.21 IC1.34
TX0: IC1.35 U1.3 | length 22.5
  Top Layer w0.381: U1.3@87.249,69.342 87.249,70.231 87.958,70.94 IC1.35
VBAT: C6.2 C11.2 IC3.5 J2.1 J3.1 R13.2 | length 39.4
  Top Layer w0.381: C6.2 83.687,76.454 ; R13.2 83.687,80.27 ; IC3.5 86.143,76.872 85.725,76.454 83.687,76.454 ; J2.1 88.608,97.066 89.154,96.52 90.805,96.52 91.567,95.758 91.567,93.98 89.789,92.202 C11.2 89.789,90.551 88.646,89.408 85.979,89.408 J3.1 83.687,87.116 83.687,80.27 ; 83.687,76.454 83.687,80.27
VCCB: C8.1 IC2.1 J2.2 R8.2 R14.1 | length 33.8
  Top Layer w0.381: J2.2 89.878,100.673 90.805,101.6 96.393,101.6 R8.2 97.282,99.187 97.282,95.758 98.171,94.869 C8.1 100.076,93.726 103.796,93.726 IC2.1 106.492,95.062 107.188,95.758 107.188,97.917 107.823,98.552 109.22,98.552 109.728,99.06 R14.1
pads on no net: IC1.4 IC1.5 IC1.6 IC1.7 IC1.8 IC1.10 IC1.11 IC1.12 IC1.13 IC1.14 IC1.16 IC1.17 IC1.18 IC1.19 IC1.20 IC1.21 IC1.22 IC1.24 IC1.26 IC1.29 IC1.30 IC1.32 IC1.36 IC1.37 IC2.4 IC4.4 J1.4 J5.7 U1.7 U1.8 U1.9 U1.10 U1.11 U1.12 U1.15
copper on no net: | length 397.8
  Top Layer w0.2: 76.2,58.674 107.823,58.674 107.823,65.913 126.365,65.913 126.365,58.674 150.368,58.674 150.368,107.442
  Bottom Layer w0.2: 76.2,58.674 76.708,58.674 107.823,58.674 107.823,65.913 126.365,65.913 126.365,59.182 126.365,58.674 150.368,58.674 150.368,59.182 150.368,107.442 76.2,107.442 76.2,58.928 76.2,58.674
  other v2: 78.613,104.902

## Polygon pours and split planes (outlines as drawn)
GND on Drill Drawing (solid): 107.823,58.674 107.823,65.913 126.365,65.913 126.365,58.674 150.368,58.674 150.368,107.442 76.2,107.442 76.2,58.674
GND on Drill Drawing (solid): 150.368,107.442 150.368,58.674 126.365,58.674 126.365,65.913 107.823,65.913 107.823,58.674 76.2,58.674 76.2,107.442

## Silkscreen, mask and mechanical layers (free items; w line width, h text height)
Top Overlay:
  text "LDH3755" at 81.915,103.378 h6
Drill Drawing:
  lines w0.2: 76.2,58.674 76.2,107.442 76.581,107.442 150.368,107.442

## Text inside footprints (layer, text, board x,y; h text height)
IC1: Mechanical 13 "ANTENNA" at 123.094,63.39 h1.78 r180